# Altium PCB PCB1.PcbDoc (part 2 of 2)
Units mil, origin at the board's own origin, x right, y up, seen from the top; angles counter-clockwise.
Board outline 16280 x 10200 mil, 2 copper layers (Top Layer, Bottom Layer); 163 components, 196 nets, 768 pads, 183 vias.
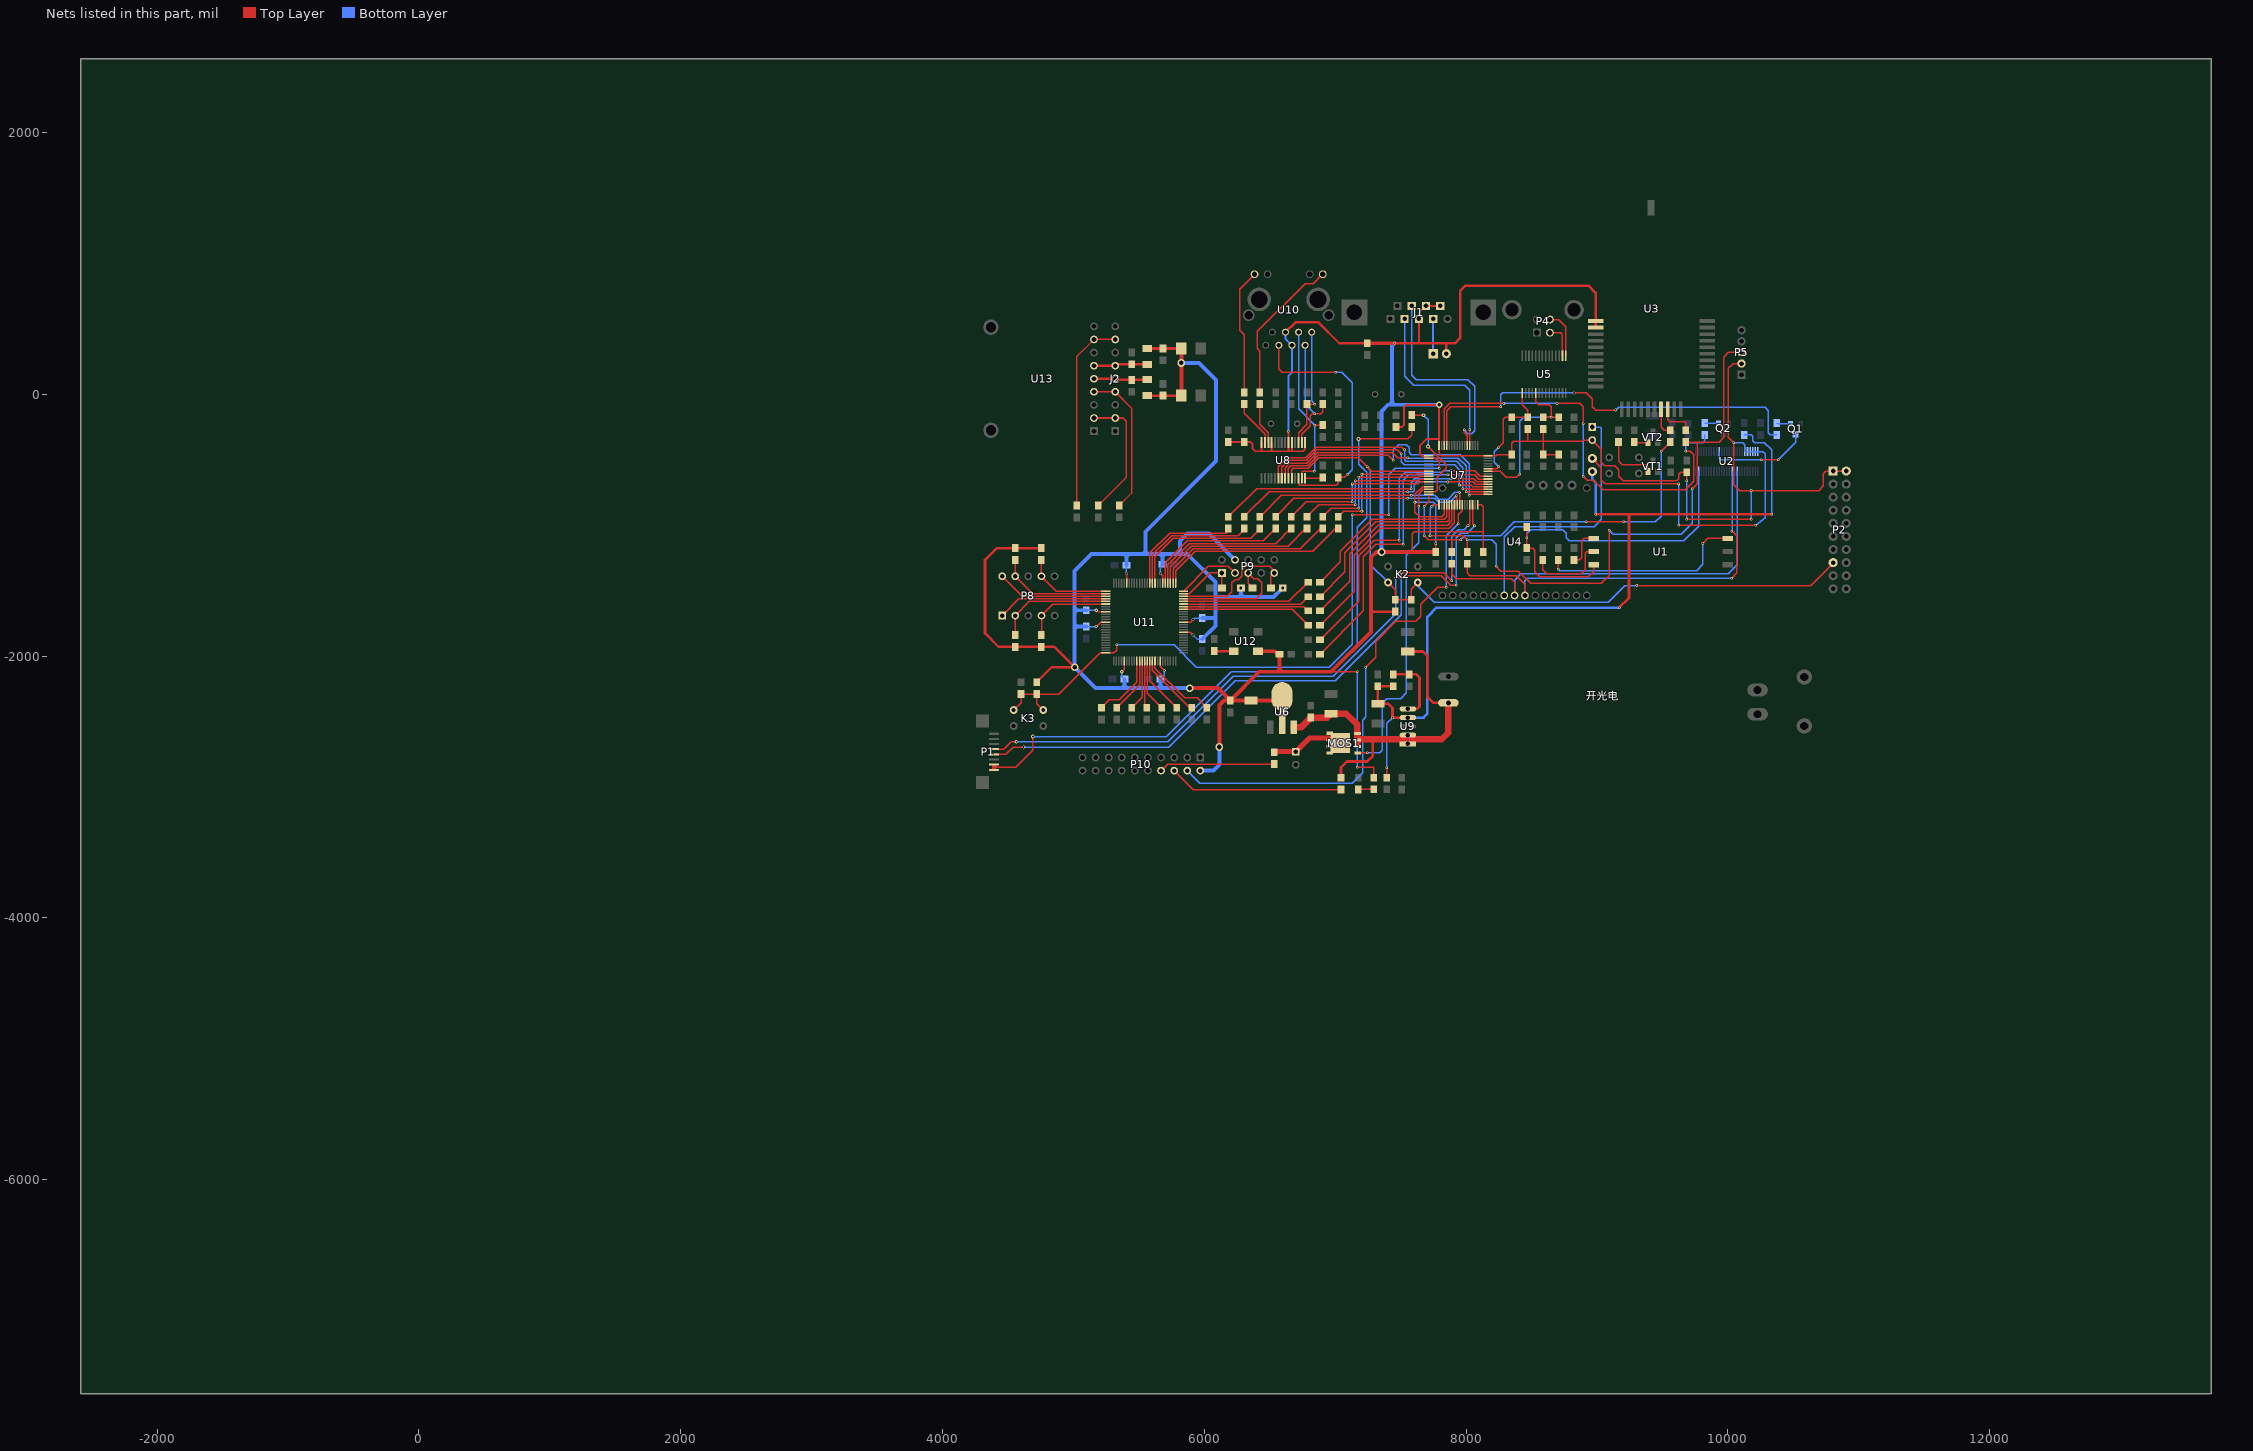
[diagram p2: the nets of this part, all layers, seen from the top]

## Via types
v1: diameter 19.68, hole 11.81, Top Layer to Bottom Layer, 147 vias
v2: diameter 25.59, hole 13.78, Top Layer to Bottom Layer, 10 vias
v3: diameter 23.62, hole 13.78, Top Layer to Bottom Layer, 8 vias
v4: diameter 30, hole 15, Top Layer to Bottom Layer, 6 vias
v5: diameter 59.06, hole 35.43, Top Layer to Bottom Layer, 5 vias
v6: diameter 157.48, hole 137.8, Top Layer to Bottom Layer, 4 vias
v7: diameter 31.5, hole 19.68, Top Layer to Bottom Layer, 2 vias
v8: diameter 50, hole 28, Top Layer to Bottom Layer, 1 vias

## Nets (pads, with @x,y where several pads share a name; then routed paths per layer and width w, separated by ;. In a path a pad name is that pad's centre, name@x,y a point inside that pad or via, vN(x,y) a via of type N, cw(c..) or ccw(c..) an arc to the next point about the centre after c; other vN are vias at no path point) (continued)
NetDS3_2: DS3.2 R41.2 | length 120.2
  Top Layer w10: R41.2@7175,-3020 7177.99,-3017.01 DS3.2@7294,-3017.01
NetMOS1_5: MOS1.0 MOS1.5 MOS1.6 MOS1.7 MOS1.8 P7.1 R48.1 | length 458.5
  Top Layer w39.37: R48.1@6535,-2730 P7.1@6700,-2730 6805,-2625 6950,-2625
NetP3_1: P3.1 U4.24 | length 2014.7
  Bottom Layer w10: U4.24@8292.44,-1537.05 8292.44,-1090 8372.44,-1010 8980,-1010 9035,-955 9035,-260 9025,-250 P3.1@8965,-250
NetP4_2: P4.2 U5.16 | length 264.4
  Top Layer w10: P4.2@8641,471 8724,471 8737.09,457.91 U5.16@8737.09,295
NetP4_3: P4.3 U5.15 | length 366.2
  Top Layer w10: P4.3@8641,571 8709,571 8762.68,517.32 U5.15@8762.68,295
NetP10_12: P10.12 U7.26 | length 3899.6
  Top Layer w10: v1(7235,-2085) 7310,-2010 7310,-1890 7465,-1735 7615,-1735 7655,-1695 7655,-1605 7785,-1475 v1(7850,-1475) ; v1(7940,-990) 7940,-920 7970.91,-889.09 U7.26@7970.91,-844.02
  Bottom Layer w10: P10.12@5870,-2875 5965,-2970 7130,-2970 7210,-2890 7210,-2490 7235,-2465 v1(7235,-2085) ; v1(7850,-1475) 7850,-1080 v1(7940,-990)
NetP10_13: P10.13 R37.1 | length 1335.1
  Top Layer w10: P10.13@5770,-2875 5915,-3020 R37.1@7045,-3020
NetP10_14: P10.14 R48.2 | length 885.7
  Top Layer w10: P10.14@5670,-2875 5720,-2825 R48.2@6535,-2825
NetQ1_2: Q1.2 R4.1 | length 107.1
  Bottom Layer w10: R4.1@10375,-220 10380,-225 Q1.2@10480,-225
NetQ2_2: Q2.2 R11.1 | length 105
  Bottom Layer w10: R11.1@9825,-220 Q2.2@9930,-220
NetR5_1: R5.1 VT1.1 | length 423.6
  Top Layer w10: R5.1@9165,-365 9165,-510 9195,-540 9375,-540 9390,-555 VT1.1@9390,-590
NetR7_2: R7.2 U2.17 U4.23 | length 3270.4
  Top Layer w10: R7.2@7890,-1295 7890,-1375 7925,-1410 8345,-1410 8371.18,-1436.18 U4.23@8371.18,-1537.05
  Bottom Layer w10: U4.23@8371.18,-1537.05 8371.18,-1418.82 8420,-1370 10005,-1370 10071.87,-1303.13 U2.17@10071.87,-587
NetR9_2: R9.2 U2.15 U4.22 | length 3464.8
  Top Layer w10: R9.2@8010,-1295 8010,-1365 8030,-1385 8385,-1385 8449.92,-1449.92 U4.22@8449.92,-1537.05 ; v1(10030,-1405) 10070,-1365 ; v1@10032.5,-1037.5 10035,-1040 10032.5,-1042.5 10070,-1080 10070,-1365 ; 10070,-1085 10070,-1365
  Bottom Layer w10: U4.22@8449.92,-1537.05 8449.92,-1425.08 8470,-1405 v1(10030,-1405) ; v1@10032.5,-1037.5 U2.15@10032.5,-587
  other v1: 10030,-1045
NetR12_2: R12.2 U3.19 | length 285.7
  Top Layer w10: U3.19@9540,-114.68 9540,-195 9555,-210 9670,-210 9680,-220 R12.2@9680,-275
NetR13_2: R13.2 U3.18 | length 215.7
  Top Layer w10: U3.18@9490,-114.68 9490,-250 9515,-275 R13.2@9560,-275
NetR14_1: R14.1 VT2.1 | length 107.1
  Top Layer w10: R14.1@9285,-365 9290,-370 VT2.1@9390,-370
NetR21_2: R21.2 U7.15 | length 852.3
  Top Layer w10: R21.2@7584,-159 7674,-159 v4(7675,-160) ; v4@7710,-390 v4(7710,-400) 7850,-540 7850,-565 7780,-635 7780,-731.5 7765.91,-745.59 U7.15@7715,-745.59
  Bottom Layer w10: v4@7680,-165 v4(7675,-160) 7710,-195 v4(7710,-400)
NetR22_1: R22.1 U11.21 | length 1013.9
  Top Layer w10: U11.21@5842.24,-1582.52 6647.48,-1582.52 R22.1@6795,-1435
NetR22_2: R22.2 U7.20 | length 1314
  Top Layer w10: R22.2@6885,-1435 7040,-1280 7040,-1200 7285,-955 7835,-955 7852.8,-937.2 U7.20@7852.8,-844.02
NetR23_1: R23.1 U11.20 | length 976.5
  Top Layer w10: U11.20@5842.24,-1602.2 6737.8,-1602.2 R23.1@6795,-1545
NetR23_2: R23.2 U7.21 | length 1429.3
  Top Layer w10: R23.2@6885,-1545 7075,-1355 7075,-1210 7310,-975 7855,-975 7872.48,-957.52 U7.21@7872.48,-844.02
NetR24_1: R24.1 U11.19 | length 966.5
  Top Layer w10: U11.19@5842.24,-1621.89 6761.89,-1621.89 R24.1@6795,-1655
NetR24_2: R24.2 U7.22 | length 1538.6
  Top Layer w10: R24.2@6885,-1655 7110,-1430 7110,-1220 7330,-1000 7860,-1000 7892.17,-967.83 U7.22@7892.17,-844.02
NetR25_1: R25.1 U11.18 | length 1003.9
  Top Layer w11.81: U11.18@5842.24,-1641.57 6671.57,-1641.57 R25.1@6795,-1765
NetR25_2: R25.2 U7.23 | length 1650.9
  Top Layer w10: R25.2@6885,-1765 7145,-1505 7145,-1230 7350,-1025 7870,-1025 7911.85,-983.15 U7.23@7911.85,-844.02
NetR26_1: R26.1 U11.26 | length 1451.9
  Top Layer w10: U11.26@5781.22,-1442.76 5781.22,-1348.78 5930,-1200 6830,-1200 R26.1@7005,-1025
NetR26_2: R26.2 U7.8 | length 1012.5
  Top Layer w10: R26.2@7005,-935 R26.2@7025,-935 7065,-895 v1(7205,-895) ; v1(7205,-610) 7620,-610 7622.21,-607.79 U7.8@7715,-607.79
  Bottom Layer w10: v1(7205,-895) v1(7205,-610)
NetR27_1: R27.1 U11.27 | length 1365.5
  Top Layer w10: U11.27@5761.54,-1442.76 5761.54,-1333.46 5915,-1180 6735,-1180 R27.1@6890,-1025
NetR27_2: R27.2 U7.9 | length 1090
  Top Layer w10: R27.2@6890,-935 R27.2@6905,-935 6970,-870 v1(7180,-870) ; v1(7180,-635) 7635,-635 7642.52,-627.48 U7.9@7715,-627.48
  Bottom Layer w10: v1(7180,-870) v1(7180,-635)
NetR28_1: R28.1 U11.28 | length 1279.2
  Top Layer w10: U11.28@5741.85,-1442.76 5741.85,-1318.15 5900,-1160 6640,-1160 R28.1@6775,-1025
NetR28_2: R28.2 U7.10 | length 1167.6
  Top Layer w10: R28.2@6775,-935 R28.2@6785,-935 6875,-845 v1(7155,-845) ; v1(7155,-660) 7635,-660 7647.84,-647.16 U7.10@7715,-647.16
  Bottom Layer w10: v1(7155,-845) v1(7155,-660)
NetR29_1: R29.1 U11.29 | length 1192.8
  Top Layer w10: U11.29@5722.17,-1442.76 5722.17,-1302.83 5885,-1140 6545,-1140 R29.1@6660,-1025
NetR29_2: R29.2 U7.11 | length 1245.2
  Top Layer w10: R29.2@6660,-935 R29.2@6665,-935 6780,-820 v1(7130,-820) ; v1(7130,-685) 7635,-685 7653.15,-666.85 U7.11@7715,-666.85
  Bottom Layer w10: v1(7130,-820) v1(7130,-685)
NetR30_1: R30.1 U11.30 | length 1106.5
  Top Layer w10: U11.30@5702.48,-1442.76 5702.48,-1287.52 5870,-1120 6450,-1120 R30.1@6545,-1025
NetR30_2: R30.2 U7.24 | length 1542.9
  Top Layer w10: R30.2@6545,-935 6685,-795 v1(7555,-795) ; v1(7925,-775) 7925,-795 7931.54,-801.54 U7.24@7931.54,-844.02
  Bottom Layer w10: v1(7555,-795) 7760,-795 7790,-825 7875,-825 v1(7925,-775)
NetR31_1: R31.1 U11.34 | length 1097.3
  Top Layer w10: U11.34@5623.74,-1442.76 5623.74,-1241.26 5765,-1100 6355,-1100 R31.1@6430,-1025
NetR31_2: R31.2 U7.25 | length 1718.9
  Top Layer w10: R31.2@6430,-935 6430,-930 6590,-770 v1(7580,-770) ; v1(7950,-750) 7951.22,-751.22 U7.25@7951.22,-844.02
  Bottom Layer w10: v1(7580,-770) 7760,-770 7790,-800 7865,-800 7915,-750 v1(7950,-750)
NetR32_1: R32.1 U11.35 | length 1011
  Top Layer w10: U11.35@5604.06,-1442.76 5604.06,-1225.94 5750,-1080 6260,-1080 R32.1@6315,-1025
NetR32_2: R32.2 U7.37 | length 2001.6
  Top Layer w10: R32.2@6315,-935 6315,-925 6495,-745 v1(7555,-745) ; v1(7860,-670) 8055,-670 8071.54,-686.53 U7.37@8167.76,-686.53
  Bottom Layer w10: v1(7555,-745) 7595,-745 7605,-735 7605,-690 7625,-670 v1(7860,-670)
NetR33_1: R33.1 U11.36 | length 924.6
  Top Layer w10: U11.36@5584.37,-1442.76 5584.37,-1210.63 5735,-1060 6165,-1060 R33.1@6200,-1025
NetR33_2: R33.2 U7.38 | length 2132.1
  Top Layer w10: R33.2@6200,-935 6200,-920 6400,-720 v1(7580,-720) ; v1(7885,-645) 8060,-645 8081.85,-666.85 U7.38@8167.76,-666.85
  Bottom Layer w10: v1(7580,-720) 7580,-675 7610,-645 v1(7885,-645)
NetR34_2: R34.2 U7.39 | length 2393.7
  Top Layer w10: R34.2@6885,-1985 7215,-1655 7215,-1240 7310,-1145 v1(7520,-1145) ; v1(7860,-615) 8065,-615 8097.16,-647.16 U7.39@8167.76,-647.16
  Bottom Layer w10: v1(7520,-1145) 7520,-655 7560,-615 v1(7860,-615)
NetR35_2: R35.2 U7.40 | length 2315
  Top Layer w10: R35.2@6885,-1875 7180,-1580 7180,-1235 7300,-1115 v1(7490,-1115) ; v1(7885,-585) 8065,-585 8107.48,-627.48 U7.40@8167.76,-627.48
  Bottom Layer w10: v1(7490,-1115) 7490,-640 7535,-595 7815,-595 7825,-585 v1(7885,-585)
NetR36_1: R36.1 U8.27 | length 359.2
  Top Layer w10: R36.1@6305,-75 6305,-145 6464.25,-304.25 U8.27@6464.25,-368.19
NetR36_2: R36.2 U10.12 | length 964.7
  Top Layer w10: R36.2@6305,15 6305,455 6270,490 6270,803.74 U10.12@6384.17,917.91
NetR38_1: R38.1 U8.26 | length 320
  Top Layer w10: R38.1@6425,-75 6425,-230 6489.84,-294.84 U8.26@6489.84,-368.19
NetR38_2: R38.2 U10.9 | length 1152.1
  Top Layer w10: R38.2@6425,15 6425,330 6405,350 6405,480 6770,845 6832.91,845 U10.9@6903.39,915.48
NetR39_1: R39.1 R42.2 U9.5 | length 527.1
  Top Layer w20: R39.1@7445,-2140 R42.2@7565,-2140 7620,-2140 7645,-2165 7645,-2385 7626.72,-2403.28 U9.5@7555.86,-2403.28
NetR43_2: R43.2 U8.14 | length 136.5
  Top Layer w10: U8.14@6771.34,-641.81 6898.19,-641.81 R43.2@6905,-635
NetR44_2: R44.2 U8.17 U10.1 | length 940.2
  Top Layer w10: U8.17@6720.16,-368.19 6720.16,-294.84 6785,-230 R44.2@6785,-75 v1(6845,-75)
  Bottom Layer w10: U10.1@6820.59,475 6820.59,-50.59 v1(6845,-75)
NetR45_2: R45.2 U8.16 U10.2 | length 1018.2
  Top Layer w10: U8.16@6745.75,-368.19 6745.75,-304.25 6810,-240 6810,-165 6825,-150 ; R45.2@6905,-75 6905,-135 6890,-150 ; 6825,-150 v1(6845,-150) ; 6825,-150 v1(6845,-150) ; v1(6845,-150) 6890,-150 ; v1(6845,-150) 6890,-150
  Bottom Layer w10: U10.2@6770.2,375 6770.2,-75.2 v1(6845,-150)
NetR46_2: R46.2 U8.13 U10.3 | length 1327.1
  Top Layer w10: U8.13@6745.75,-641.81 6745.75,-594.25 6751.49,-588.51 v1(6841.49,-588.51) v1@6845,-585 ; v1(6845,-235) R46.2@6905,-235
  Bottom Layer w10: U10.3@6720.59,475 6720.59,-110.59 v1(6845,-235) 6845,-585 v1(6841.49,-588.51)
NetR47_2: R47.2 U8.12 U10.6 | length 1981.8
  Top Layer w10: U10.6@6570,375 6570,195 6595,170 v1(7005,170) ; U8.12@6720.16,-641.81 6720.16,-685.16 6730,-695 7010,-695 7025,-680 R47.2@7025,-635 7070,-635 v1(7095,-610)
  Bottom Layer w10: v1(7005,170) 7050,170 7130,90 7130,-575 v1(7095,-610)
NetR53_2: R53.2 U11.85 | length 513.9
  Top Layer w10: R53.2@5215,-2395 5275,-2335 5350,-2335 5485.94,-2199.06 U11.85@5485.94,-2037.24
NetR54_2: R54.2 U11.86 | length 430.5
  Top Layer w10: R54.2@5330,-2395 5505.63,-2219.37 U11.86@5505.63,-2037.24
NetR55_2: R55.2 U11.87 | length 391
  Top Layer w10: R55.2@5445,-2395 5525.32,-2314.68 U11.87@5525.32,-2037.24
NetR58_2: R58.2 U11.88 | length 364
  Top Layer w10: U11.88@5545,-2037.24 5545,-2380 R58.2@5560,-2395
NetR59_2: R59.2 U11.89 | length 403.4
  Top Layer w10: U11.89@5564.69,-2037.24 5564.69,-2284.69 R59.2@5675,-2395
NetR60_2: R60.2 U11.90 | length 442.9
  Top Layer w10: U11.90@5584.37,-2037.24 5584.37,-2189.37 R60.2@5790,-2395
NetR61_2: R61.2 U11.91 | length 491.2
  Top Layer w10: U11.91@5604.06,-2037.24 5604.06,-2109.06 5890,-2395 R61.2@5905,-2395
NetR62_2: R62.2 U12.3 | length 147.2
  Top Layer w19.68: R62.2@6078.27,-1963.27 U12.3@6225.47,-1963.27
NetR63_2: R63.2 U11.92 | length 577.5
  Top Layer w10: U11.92@5623.74,-2037.24 5623.74,-2093.74 5850,-2320 5945,-2320 R63.2@6020,-2395
NetS1_1: S1.1 U2.26 U2.27 U2.28 U2.29 U2.30 | length 2422.1
  Top Layer w10: S1.1@8965,-490 9035,-560 9035,-655 9065,-685 v1(9625,-685) ; v1(9625,-1000) v1(10215,-1000)
  Bottom Layer w10: v1(9625,-1000) v1(9625,-685) ; U2.30@10150.61,-437.39 U2.29@10170.29,-437.39 U2.28@10189.98,-437.39 U2.27@10209.66,-437.39 U2.26@10229.35,-437.39 10267.39,-437.39 10285,-455 10285,-945 v1(10215,-1000)
NRST: C7.2 K2.2 K2.3 P2.15 R16.2 U7.7 U8.10 | length 5957.2
  Top Layer w10: U8.10@6668.98,-641.81 6668.98,-576.02 6680,-565 6795,-565 6875,-485 7175,-485 7278.11,-588.11 U7.7@7715,-588.11 ; K2.2@7405,-1437.6 7460,-1492.6 R16.2@7460,-1570 C7.2@7580,-1570 7580,-1488.6 K2.3@7631,-1437.6 ; v1@9304,-1461 v1(9305,-1460) 9305,-1461 10635,-1461 P2.15@10805,-1291
  Bottom Layer w10: v1(7245,-555) 7270,-580 7270,-1302.6 K2.2@7405,-1437.6 ; K2.3@7606,-1437.6 7758.4,-1590 9085,-1590 9214,-1461 v1@9304,-1461
OPT_S_1: P8.1 U11.54 | length 845.4
  Top Layer w10: P8.1@4455,-1690 4582.17,-1562.83 U11.54@5247.76,-1562.83
OPT_S_2: P8.2 R49.1 U11.55 | length 884.9
  Top Layer w10: P8.2@4555,-1690 4662.48,-1582.52 U11.55@5247.76,-1582.52 ; R49.1@4556.61,-1838.39 P8.2@4556.61,-1690.75
OPT_S_4: P8.4 R51.1 U11.56 | length 676.8
  Top Layer w10: P8.4@4755,-1690 4842.8,-1602.2 U11.56@5247.76,-1602.2 ; R51.1@4756.61,-1838.39 P8.4@4756.61,-1690.75
OPT_S_6: P8.6 U11.53 | length 856.2
  Top Layer w10: P8.6@4455,-1390 4608.15,-1543.15 U11.53@5247.76,-1543.15
OPT_S_7: P8.7 R50.2 U11.52 | length 871.8
  Top Layer w10: P8.7@4555,-1390 4688.46,-1523.46 U11.52@5247.76,-1523.46 ; P8.7@4556.1,-1389.84 R50.2@4556.1,-1266.1
OPT_S_9: P8.9 R52.2 U11.51 | length 663.6
  Top Layer w10: P8.9@4755,-1390 4868.78,-1503.78 U11.51@5247.76,-1503.78 ; P8.9@4756.1,-1389.84 R52.2@4756.1,-1266.1
OTDR_S: MOS1.4 U7.14 | length 2422.9
  Top Layer w10: MOS1.4@7172,-2740 v1(7245,-2740) ; v1(7640,-855) 7640,-760 7674.1,-725.9 U7.14@7715,-725.9
  Bottom Layer w10: v1(7245,-2740) 7340,-2740 7360,-2720 7360,-2360 7395,-2325 7500,-2325 7545,-2280 7545,-1230 7640,-1135 v1(7640,-855)
OTDR_V33: P1.7 P1.8 R21.1 | length 5386.6
  Top Layer w10: P1.8@4393.74,-2868.9 4412.64,-2850 4414.21,-2850 ; P1.7@4393.74,-2829.53 4414.21,-2850 ; v4(4690,-2615) 4690,-2720 4560,-2850 4414.21,-2850 ; v4(7180,-340) 7555,-340 7584,-311 R21.1@7584,-249
  Top Layer w30: 4395,-2860 4395,-2840
  Bottom Layer w10: v4(4690,-2615) 5710,-2615 6205,-2120 ; 6210,-2120 6970,-2120 7170,-1920 7170,-1015 7240,-945 7240,-595 7180,-535 v4(7180,-340)
PB8: R4.2 U7.61 | length 3179.7
  Top Layer w10: U7.61@7852.8,-391.26 7852.8,-127.2 7885,-95 v1(8265,-95) ; v1(8825,10) 8920,10 8965,-35 8965,-95 8990,-120 v1(9145,-120)
  Bottom Layer w10: v1(8265,-95) 8265,-5 8280,10 v1(8825,10) ; v1(9145,-120) 9165,-100 10285,-100 10310,-125 10310,-295 10325,-310 R4.2@10375,-310
PB9: R11.2 U7.62 | length 3339.2
  Top Layer w10: U7.62@7833.11,-391.26 7833.11,-111.89 7875,-70 v1(8290,-70) ; v1(8695,-70) 8870,-70 8895,-95 v1(8895,-225) ; v1(8895,-625) 8925,-655 8973.43,-655 9048.43,-730 9675,-730 9740,-665 9740,-460 9715,-435 v1(9680,-435)
  Bottom Layer w10: v1(8290,-70) v1(8695,-70) ; v1(8895,-625) v1(8895,-225) ; v1(9680,-435) 9680,-390 9700,-370 9810,-370 9825,-355 R11.2@9825,-310
PC11: J1.4 U7.52 | length 1402.2
  Top Layer w10: U7.52@8029.96,-391.26 v1(8030,-270)
  Bottom Layer w10: J1.4@7530.89,575.75 7530.89,139.11 7600,70 7990,70 8030,30 v1(8030,-270)
PC12: J1.8 U7.53 | length 1618.4
  Top Layer w10: v1(7985,-270) 7985,-290 8010.28,-315.28 U7.53@8010.28,-391.26
  Bottom Layer w10: J1.8@7585.05,675.75 7585.05,144.95 7620,110 8015,110 8065,60 8065,-280 8045,-300 8015,-300 v1(7985,-270)
RD: J2.2 R65.2 U13.2 | length 987.9
  Top Layer w11.81: U13.2@5161.06,-181.06 J2.2@5320,-181.06 5381.06,-181.06 5405,-205 5405,-635 R65.2@5190,-850
REMOTE: J1.2 P6.1 | length 266.1
  Bottom Layer w15: J1.2@7749.22,575.75 7749.22,310.78 P6.1@7750,310
RST_N: C44.2 K3.2 K3.3 R67.1 U7.2 U11.75 | length 5261.6
  Top Layer w10: K3.3@4544,-2412.4 4544,-2411 4600,-2355 C44.2@4600,-2290 R67.1@4720,-2290 ; K3.2@4770,-2412.4 4720,-2362.4 R67.1@4720,-2290 ; v1(5330,-1915) 5330,-1955 5308.78,-1976.22 U11.75@5247.76,-1976.22 5203.78,-1976.22 4890,-2290 R67.1@4720,-2290 ; v1(7130,-920) v1(7410,-920) ; U7.2@7715,-489.68 7769.68,-489.68 7795,-515 v1(7795,-565)
  Bottom Layer w10: v1(5330,-1915) 5770,-1915 5940,-2085 6955,-2085 7130,-1910 v1(7130,-920) ; v1(7410,-920) 7410,-615 7460,-565 v1(7795,-565)
"RX VCC": C40.1 J2.5 L2.2 U13.5 | length 413.7
  Top Layer w19.68: U13.5@5155,118.94 J2.5@5320,118.94 5328.94,110 C40.1@5445,110 L2.2@5565,110
SD: J2.4 R66.2 U13.4 | length 1124
  Top Layer w11.81: U13.4@5156.06,18.94 J2.4@5320,18.94 5445,-106.06 5445,-755 R66.2@5350,-850
SIM-CLK: R1.1 U1.3 | length 293.6
  Top Layer w10: R1.1@8825,-1265 8870,-1265 8885,-1250 8885,-1120 8903.37,-1101.63 U1.3@8974.75,-1101.63
SIM-IO: R2.1 U1.6 | length 1563.5
  Top Layer w10: v1(8705,-1335) R2.1@8705,-1265 ; v1(9810,-1140) 9848.37,-1101.63 U1.6@9998.37,-1101.63
  Bottom Layer w10: v1(8705,-1335) 8716.78,-1346.78 9763.22,-1346.78 9810,-1300 v1(9810,-1140)
SIM-RST: R3.1 U1.2 | length 620.1
  Top Layer w10: R3.1@8585,-1265 8585,-1340 8615,-1370 8880,-1370 8910,-1340 8910,-1215 8923.37,-1201.63 U1.2@8974.75,-1201.63
SIM-VCC: C4.2 R8.2 U1.1 U2.2 | length 2805
  Top Layer w10: C4.2@8465,-1015 v1(8465,-1095) R8.2@8465,-1175 8510,-1175 8525,-1190 8525,-1355 8565,-1395 8935,-1395 8974.75,-1355.25 U1.1@8974.75,-1301.63
  Bottom Layer w10: v1(8465,-1095) 8465,-1065 8495,-1035 8740,-1035 8765,-1060 8765,-1095 8790,-1120 9665,-1120 9776.59,-1008.41 U2.2@9776.59,-587
SPI-MISO: U7.35 U8.6 | length 2021.6
  Top Layer w10: U8.6@6566.61,-641.81 6566.61,-553.39 6635,-485 6775,-485 6855,-405 7510,-405 v1(7530,-425) ; v1(7975,-720) 8020,-720 8025.91,-725.9 U7.35@8167.76,-725.9
  Bottom Layer w10: v1(7530,-425) 7530,-500 7542.5,-512.5 7927.5,-512.5 7975,-560 v1(7975,-720)
SPI-MOSI: U7.36 U8.7 | length 1936.5
  Top Layer w10: U8.7@6592.2,-641.81 6592.2,-557.8 6645,-505 6780,-505 6860,-425 7475,-425 v1(7505,-455) ; v1(7950,-695) 8040,-695 8051.22,-706.22 U7.36@8167.76,-706.22
  Bottom Layer w10: v1(7505,-455) 7505,-515 7527.5,-537.5 7912.5,-537.5 7950,-575 v1(7950,-695)
SPI-NSS: U7.33 U8.9 | length 2080.2
  Top Layer w10: U8.9@6643.39,-641.81 6643.39,-566.61 6665,-545 6790,-545 6870,-465 7405,-465 v1(7445,-505) ; v1@8029.73,-765.27 U7.33@8167.76,-765.27
  Bottom Layer w10: v1(7445,-505) 7445,-425 7485,-385 7545,-385 7564.38,-404.37 7564.38,-444.37 7582.5,-462.5 7957.5,-462.5 8025,-530 v1(8025,-770) v1@8029.73,-765.27
SPI-SCK: U7.34 U8.8 | length 1919.8
  Top Layer w10: U8.8@6617.8,-641.81 6617.8,-562.2 6655,-525 6785,-525 6865,-445 7440,-445 7480,-485 v1(7555,-485) ; v1(8000.59,-745.59) U7.34@8167.76,-745.59
  Bottom Layer w10: v1(7555,-485) 7557.5,-487.5 7942.5,-487.5 8000.59,-545.59 v1(8000.59,-745.59)
TCK: P9.1 R64.2 U11.24 | length 473.4
  Top Layer w10: U11.24@5842.24,-1523.46 5886.54,-1523.46 6045,-1365 P9.1@6135,-1365 R64.2@6135,-1480
TD: J2.8 R68.2 U13.8 | length 1484.8
  Top Layer w11.81: R68.2@5025,-850 5025,286.25 U13.8@5157.6,418.85 ; U13.8@5158.94,418.94 J2.8@5320,418.94
TDI: P9.9 R57.1 U11.23 | length 1009.5
  Top Layer w10: U11.23@5842.24,-1543.15 6176.85,-1543.15 6210,-1510 6210,-1440 6235,-1415 6260,-1415 6285,-1390 6285,-1345 6315,-1315 6500,-1315 6535,-1350 P9.9@6535,-1365 6510,-1390 R57.1@6510,-1480
TDO: P9.3 U11.25 | length 491.7
  Top Layer w10: U11.25@5842.24,-1503.78 6031.02,-1315 6185,-1315 P9.3@6235,-1365
TERM_ON: Q1.3 U2.41 | length 887
  Top Layer w10: v1(10255,-500) v1(10385,-500) v1(10255,-500)
  Bottom Layer w10: U2.41@9934.07,-437.39 9934.07,-489.07 9945,-500 v1(10255,-500) ; v1(10385,-500) 10517.5,-367.5 Q1.3@10517.5,-305
TMS: P9.5 R56.1 U11.22 | length 961.1
  Top Layer w10: U11.22@5842.24,-1562.83 6397.17,-1562.83 6440,-1520 6440,-1440 6410,-1410 6380,-1410 P9.5@6335,-1365 6335,-1445 R56.1@6370,-1480
"TX VCC": C43.2 J2.6 L3.2 U13.6 | length 414.6
  Top Layer w19.68: U13.6@5155,218.94 J2.6@5320,218.94 5331.06,230 C43.2@5445,230 L3.2@5565,230
UART1_RX: C13.2 R18.2 U5.1 U7.43 | length 889.1
  Top Layer w10: U7.43@8167.76,-568.42 8236.58,-568.42 v1(8250,-555) ; v1(8247.82,-407.18) 8285,-370 8285,-190 8300,-175 C13.2@8350,-175 R18.2@8470,-175 8470,-120 8430,-80 U5.1@8430,10
  Bottom Layer w10: v1(8247.82,-407.18) 8215,-440 8215,-520 v1(8250,-555)
UART1_TX: C12.2 R17.2 U5.5 U7.42 | length 1328.7
  Top Layer w10: U7.42@8167.76,-588.11 8260,-588.11 8306.89,-635 8385,-635 v1(8410,-610) ; U5.5@8532.36,10 8532.36,-55 8557.36,-80 8635,-80 8650,-95 v1(8650,-175) ; R17.2@8590,-175 v1(8650,-175) ; C12.2@8710,-175 v1(8650,-175)
  Bottom Layer w10: v1(8410,-610) 8410,-205 8440,-175 v1(8650,-175)
UART2_RX: P5.3 R9.1 R12.1 U7.17 | length 4756.3
  Top Layer w10: v1(7725,-1080) 7980,-1080 v1(8010,-1110) R9.1@8010,-1205 ; v1(7740,-855) 7750.98,-844.02 U7.17@7793.74,-844.02 ; v1(8230,-1315) 8265,-1350 8400,-1350 8495,-1445 9035,-1445 9095,-1385 v1(9095,-1040) ; R12.1@9680,-365 9765,-365 ; v1(9730,-720) 9765,-685 9765,-365 ; P5.3@10105,320 10005,320 9970,285 9970,-330 9935,-365 9765,-365
  Bottom Layer w10: 7725,-1070 7725,-870 v1(7740,-855) v1@7740,-860 ; v1(8010,-1110) 8195,-1110 8230,-1145 v1(8230,-1315) ; v1(9095,-1040) 9125,-1070 9645,-1070 9730,-985 v1(9730,-720)
UART2_TX: R7.1 R13.1 U7.16 | length 3155.2
  Top Layer w10: v1(7680,-1080) 7710,-1110 ; v1(7680,-855) 7715,-820 U7.16@7715,-765.27 ; R7.1@7890,-1205 7890,-1110 ; v1(8920,-975) v1(9205,-975) ; v1(9490,-435) R13.1@9560,-365 ; 7710,-1110 7890,-1110 ; 7710,-1110 7890,-1110 ; 7890,-1110 v1(7960,-1110) 7890,-1110
  Bottom Layer w10: 7680,-1070 v1(7680,-855) ; v1(7960,-1110) 7990,-1080 8265,-1080 8370,-975 v1(8920,-975) ; v1(9205,-975) 9445,-975 9490,-930 v1(9490,-435)
UART3_RX: P1.4 U7.30 | length 4982.5
  Top Layer w10: P1.4@4393.74,-2711.42 4468.58,-2711.42 4525,-2655 v2(4565,-2655) ; v1(7465,-1400) 7520,-1400 7535,-1385 7810,-1385 7885,-1460 v1(7925,-1460) ; U7.30@8049.65,-844.02 8049.65,-989.65 v1(8065,-1005)
  Bottom Layer w10: v2(4565,-2655) 5720,-2655 6220,-2155 6985,-2155 7465,-1675 v1(7465,-1400) ; v1(7925,-1460) 7925,-1095 7960,-1060 8010,-1060 v1(8065,-1005)
UART3_TX: P1.5 U7.29 | length 4947.9
  Top Layer w10: P1.5@4393.74,-2750.79 4484.21,-2750.79 4540,-2695 v2(4620,-2695) ; v1(7505,-1365) 7830,-1365 v1(7890,-1425) ; v1(8015,-1005) 8029.96,-990.04 U7.29@8029.96,-844.02
  Bottom Layer w10: v2(4620,-2695) 5730,-2695 6235,-2190 7000,-2190 7505,-1685 v1(7505,-1365) ; v1(7890,-1425) 7890,-1085 7940,-1035 7985,-1035 v1(8015,-1005)
VCC: C8.1 CA2.1 D1.2 MOS1.1 MOS1.2 MOS1.3 R37.2 U6.3 U9.1 U9.2 开光电.3 | length 2807.5
  Top Layer w20: R37.2@7045,-2930 7045,-2850 7090,-2805 7245,-2805 7287.5,-2762.5 7287.5,-2637.5 7285,-2635 ; D1.2@7554.06,-1966 D1.2@7555.06,-1965 7670,-1965 7705,-2000 7705,-2312.56 7750,-2357.56 开光电.3@7865,-2357.56 ; 7700,-2635 7705,-2630
  Top Layer w50: U6.3@6685,-2545 6740,-2545 C8.1@6815,-2470 6940,-2470 CA2.1@6969,-2441 ; CA2.1@6970,-2440 7085,-2440 7170.5,-2525.5 MOS1.1@7170.5,-2591 ; 7170.5,-2675 MOS1.2@7170.5,-2640 ; MOS1.2@7171,-2640 MOS1.2@7170.5,-2640 ; MOS1.1@7171,-2591 MOS1.1@7170.5,-2591 ; 开光电.3@7865,-2357.56 7865,-2585 7815,-2635 7700,-2635 7555.86,-2635 7285,-2635 7171,-2635 MOS1.2@7170.5,-2635 ; MOS1.2@7170.5,-2640 MOS1.2@7170.5,-2635 ; MOS1.2@7170.5,-2635 MOS1.1@7170.5,-2591
VCC3V3: C9.1 C14.1 C15.1 C16.1 C17.1 C21.1 C26.1 C29.2 C30.2 C31.2 C32.2 C33.2 C34.2 C35.2 C36.2 C37.2 C38.1 C39.1 C41.1 C42.1 CA3.1 DS3.1 J1.3 J1.6 J1.7 L1.1 L2.1 L3.1 P2.1 P2.2 P3.2 P5.2 P6.2 P9.4 P10.11 R6.2 R16.1 R17.1 R18.1 R19.2 R20.2 R49.2 R50.1 R51.2 R52.1 R56.2 R57.2 R67.2 U2.31 U3.1 U3.2 U6.2 U7.1 U7.13 U7.19 U7.32 U7.48 U7.64 U8.15 U8.19 U8.20 U8.25 U8.28 U10.4 U10.5 U11.9 U11.13 U11.31 U11.45 U11.59 U11.63 U11.80 U11.94 U12.4 | length 34210.4
  Top Layer w10: U8.19@6668.98,-402.64 U8.19@6668.98,-368.19 ; 6970,-2120 v1(7170,-2120) ; v1(7170,-2850) 7171,-2851 7294,-2851 DS3.1@7294,-2930 ; 7590,-1205 7590,-1065 7605,-1050 8130,-1050 ; U7.13@7715,-706.22 7668.78,-706.22 7610,-765 v1(7610,-825) 7610,-900 7645,-935 7815,-935 7833.11,-916.89 U7.19@7833.11,-844.02 ; C16.1@7770,-1205 v1(7770,-1140) ; U7.64@7793.74,-391.26 7793.74,-448.74 7815,-470 U7.48@8167.76,-470 8230,-470 8240,-460 C17.1@8350,-460 8350,-375 8365,-360 8470,-360 ; U7.32@8089.02,-844.02 8089.02,-845 8115,-845 8130,-860 8130,-1050 ; C14.1@8130,-1205 8130,-1050 ; R18.1@8470,-265 8470,-360 ; R17.1@8590,-265 8590,-360 ; R20.2@8710,-460 R19.2@8590,-460 8590,-360 ; v1(9685,-955) v1(10180,-955) ; v1(9685,-660) R6.2@9685,-595 9640,-595 9625,-610 9625,-645 9610,-660 9200,-660 9165,-625 9165,-575 9135,-545 9060,-545 9035,-520 9035,-420 P3.2@8965,-350 8895,-350 8885,-360 8590,-360 ; P5.2@10105,235 10040,235 10005,200 10005,-330 v1(10045,-370) 10045,-690 10090,-735 v1(10180,-735) ; v1@10180,-740 v1(10180,-735) ; P2.2@10905,-586 P2.1@10805,-586 10750,-586 10730,-606 10730,-700 10695,-735 v1(10180,-735) ; 8470,-360 8590,-360
  Top Layer w11.02: v3(5175,-1775) 5210,-1740 U11.63@5247.76,-1740 ; v3(5175,-1650) 5186.26,-1661.26 U11.59@5247.76,-1661.26 ; v3(5370,-2120) 5387.52,-2102.48 U11.80@5387.52,-2037.24 ; v3(5405,-1370) 5407.2,-1372.2 U11.45@5407.2,-1442.76 ; U11.94@5663.11,-2037.24 5663.11,-2078.11 v3(5695,-2110) ; v3(5665,-1370) 5682.8,-1387.8 U11.31@5682.8,-1442.76 ; U11.9@5842.24,-1818.74 5893.74,-1818.74 v3(5915,-1840) ; U11.13@5842.24,-1740 5895,-1740 v3(5915,-1720)
  Top Layer w15: C26.1@6185,-365 C21.1@6305,-365 6355,-365 6370,-380 6370,-415 6390,-435 6438.66,-435 ; U8.28@6438.66,-368.19 6438.66,-435 ; U8.25@6515.43,-368.19 6515.43,-435 ; v1(6643.39,-281.61) U8.20@6643.39,-368.19 6643.39,-435 ; U8.19@6668.98,-402.64 6668.98,-433.98 6670,-435 ; U8.15@6771.34,-368.19 6771.34,-418.66 6755,-435 6670,-435 ; C15.1@7465,-250 7510,-250 7525,-235 7525,-100 7545,-80 7793.74,-80 U7.64@7793.74,-391.26 ; 7640.05,390.05 J1.3@7640.05,575.75 7640.05,621.58 J1.7@7694.22,675.75 J1.6@7803.39,675.75 ; U7.1@7715,-470 7665,-470 7650,-455 7650,-390 7700,-340 7785,-340 ; 6438.66,-435 6515.43,-435 ; 6515.43,-435 6643.39,-435 ; 6643.39,-435 6670,-435
  Top Layer w19.68: R67.2@4720,-2200 4835,-2085 v5(5010,-2085) 4855,-1930 R51.2@4755,-1930 R49.2@4555,-1930 4430,-1930 4325,-1825 4325,-1265 4415,-1175 R50.1@4555,-1175 R52.1@4755,-1175 ; L2.1@5565,-10 C39.1@5685,-10 C38.1@5825,-10 ; L3.1@5565,350 C42.1@5685,350 C41.1@5825,350 ; U10.5@6620.59,475 6695.59,550 6871.39,550 7031.39,390 L1.1@7245,390 ; 7275,-1675 7290,-1660 ; 7275,-1645 7290,-1660 ; 7280,-1660 7290,-1660 ; R16.1@7460,-1660 7290,-1660
  Top Layer w20: v1(7455,390) 7850,390 ; P6.2@7850,310 7850,390 ; U3.2@8990.32,510 8990,510 U3.1@8990,560 ; U3.1@8990.32,560 U3.1@8990,560 ; 7850,390 7915,390 7955,430 7955,790 7995,830 8935,830 8990,775 U3.1@8990,560
  Top Layer w30: C38.1@5825,-10 v5(5825,240) C41.1@5825,350 ; v5(5890,-2245) 6106,-2245 C9.1@6200,-2339 ; v5(6115,-2695) 6115,-2375 6150,-2340 C9.1@6200,-2340 ; CA3.1@6340,-2340 6564,-2340 U6.2@6595,-2309 ; CA3.1@6341,-2339 C9.1@6200,-2339 ; U12.4@6410,-1963.27 U12.4@6410.47,-1963.27 6538.27,-1963.27 C37.2@6560,-1985 ; C37.2@6575,-1985 6575,-2100 ; L1.1@7245,390 v1(7455,390) ; C16.1@7770,-1205 7590,-1205 v5(7355,-1205) 7315,-1205 7275,-1245 7275,-1645 7275,-1675 7275,-1815 6970,-2120 6595,-2120 ; C9.1@6200,-2339 6419,-2120 6555,-2120 ; 6555,-2120 6575,-2120 ; 6555,-2120 6575,-2100 ; 6575,-2120 6575,-2100 ; 6575,-2120 6595,-2120 ; 6575,-2100 6595,-2120
  Bottom Layer w10: v1(7170,-2850) v1(7170,-2120) ; v1(7610,-825) 7750,-825 7770,-845 v1(7770,-1140) ; v1(9685,-955) v1(9685,-660) ; v1(10045,-370) 10115,-370 10130.92,-385.92 U2.31@10130.92,-437.39 ; v1(10180,-955) v1@10180,-740
  Bottom Layer w11.81: C35.2@5100,-1775 v3(5175,-1775) ; C34.2@5100,-1650 v3(5175,-1650) ; v3(5370,-2120) 5370,-2155 C36.2@5390,-2175 C36.2@5390,-2180 ; v3(5405,-1370) C29.2@5405,-1305 ; C32.2@5665,-2175 5695,-2145 v3(5695,-2110) ; v3(5665,-1370) 5665,-1315 C33.2@5680,-1300 ; v3(5915,-1840) 5945,-1870 C30.2@5985,-1870 ; v3(5915,-1720) 5925,-1710 C31.2@5985,-1710
  Bottom Layer w15: U10.5@6620.59,475 6620.59,424.61 U10.4@6670.2,375 6670.2,165.2 6643.39,138.39 v1(6643.39,-281.61)
  Bottom Layer w30: C35.2@5100,-1775 5030,-1775 ; C34.2@5100,-1650 5030,-1650 ; C36.2@5390,-2180 5390,-2225 ; C29.2@5405,-1305 5405,-1240 ; C32.2@5665,-2175 5665,-2225 ; C33.2@5680,-1300 5680,-1240 ; v5(5825,240) 5960,240 6090,110 6090,-510 5550,-1050 5550,-1200 ; v5(5890,-2245) 5685,-2245 ; P10.11@5970,-2875 6070,-2875 6115,-2830 v5(6115,-2695) ; C30.2@5985,-1870 6085,-1770 6085,-1710 ; C31.2@5985,-1710 6085,-1710 ; P9.4@6235,-1265 6035,-1065 5870,-1065 5815,-1120 5815,-1200 ; v7(6280,-1480) 6280,-1530 ; v7(6600,-1480) 6530,-1550 6300,-1550 ; v5(7355,-1205) 7355,-130 7405,-80 7415,-80 ; v1(7455,390) 7435,370 7435,-60 ; v8(7795,-80) 7455,-80 ; 5010,-1795 5030,-1775 ; 5010,-1795 v5(5010,-2085) 5170,-2245 5370,-2245 ; 5010,-1795 5010,-1775 ; 5010,-1775 5030,-1775 ; 5010,-1775 5010,-1755 ; 5010,-1755 5030,-1775 ; 5010,-1755 5010,-1670 ; 5010,-1670 5010,-1650 ; 5010,-1670 5030,-1650 ; 5010,-1650 5010,-1630 ; 5010,-1650 5030,-1650 ; 5010,-1630 5030,-1650 ; 5010,-1630 5010,-1350 5140,-1220 5385,-1220 ; 5370,-2245 5390,-2245 ; 5370,-2245 5390,-2225 ; 5385,-1220 5405,-1220 ; 5385,-1220 5405,-1240 ; 5390,-2245 5390,-2225 ; 5390,-2245 5410,-2245 ; 5390,-2225 5410,-2245 ; 5405,-1240 5405,-1220 ; 5405,-1240 5425,-1220 ; 5405,-1220 5425,-1220 ; 5410,-2245 5645,-2245 ; 5425,-1220 5530,-1220 ; 5530,-1220 5550,-1200 ; 5530,-1220 5550,-1220 ; 5550,-1220 5550,-1200 ; 5550,-1220 5570,-1220 ; 5550,-1200 5570,-1220 ; 5570,-1220 5660,-1220 ; 5645,-2245 5665,-2245 ; 5645,-2245 5665,-2225 ; 5660,-1220 5680,-1240 ; 5660,-1220 5680,-1220 ; 5665,-2245 5665,-2225 ; 5665,-2245 5685,-2245 ; 5665,-2225 5685,-2245 ; 5680,-1240 5700,-1220 ; 5680,-1240 5680,-1220 ; 5680,-1220 5700,-1220 ; 5700,-1220 5795,-1220 ; 5795,-1220 5815,-1220 ; 5795,-1220 5815,-1200 ; 5815,-1220 5815,-1200 ; 5815,-1220 5835,-1220 ; 5815,-1200 5835,-1220 ; 5835,-1220 5870,-1220 6085,-1435 6085,-1550 ; 6085,-1710 6085,-1550 ; 6085,-1550 6260,-1550 ; 6260,-1550 6280,-1550 ; 6260,-1550 6280,-1530 ; 6280,-1550 6300,-1550 ; 6280,-1550 6280,-1530 ; 6280,-1530 6300,-1550 ; 7415,-80 7435,-80 ; 7415,-80 7435,-60 ; 7435,-80 7435,-60 ; 7435,-80 7455,-80 ; 7435,-60 7455,-80
VCC4: C24.1 CA4.1 DS2.1 R10.2 R39.2 S1.2 U9.4 | length 6634.3
  Top Layer w10: DS2.1@7394,-2930 v1(7394,-2854)
  Top Layer w20: R39.2@7445,-2230 C24.1@7325,-2230 7326,-2231 CA4.1@7326,-2364 7405,-2364 7438.31,-2397.31 v1(7438.31,-2470.21) U9.4@7555.86,-2470.21 ; v1(8990,-915) v1(10335,-915) ; v1(9170,-1630) 9245,-1555 9245,-920
  Bottom Layer w10: v1(7394,-2854) 7394,-2514.53 v1(7438.31,-2470.21) ; R10.2@10125,-310 10180,-310 10190,-320 10190,-355 10205,-370 10280,-370 10335,-425 v1(10335,-915)
  Bottom Layer w20: U9.4@7555.86,-2470.21 7674.79,-2470.21 7705,-2440 7705,-1700 7775,-1630 v1(9170,-1630) ; S1.2@8965,-590 8965,-650 8990,-675 v1(8990,-915)
pads on no net: J1.1 J2.3 J2.7 P1.0 P1.1 P1.2 P2.17 P2.19 P4.5 P4.6 P5.1 P5.4 P9.6 P9.7 P9.8 U1.5 U2.5 U2.7 U2.9 U2.10 U2.11 U2.12 U2.14 U2.16 U2.19 U2.20 U2.32 U2.33 U2.34 U2.35 U2.36 U2.37 U2.38 U2.39 U2.43 U2.44 U2.45 U2.46 U2.47 U2.48 U2.49 U2.50 U3. U3.3 U3.4 U3.5 U3.6 U3.8 U3.9 U3.10 U3.11 U3.12 U3.13 U3.14 U3.16 U3.17 U3.20 U3.21 U3.22 U3.23 U3.24 U3.25 U3.26 U3.27 U3.28 U3.29 U4.1 U4.16 U4.17 U4.18 U4.19 U4.20 U4.21 U4.26 U4.27 U4.28 U4.29 U5.2 U5.3 U5.6 U5.8 U5.9 U5.10 U5.11 U5.12 U5.14 U5.19 U5.22 U5.24 U5.27 U5.28 U7.3 U7.4 U7.41 U7.44 U7.45 U7.54 U8.3 U8.5 U10. U10.7 U11.33 U11.37 U11.41 U11.42 U12.1 U13.3 U13.7 U13.10 U13.11
copper on no net:
  other v6: 7865,-2830 10207.52,-2830 7865,-1904.8 10207.52,-1904.8

## Polygon pours and split planes (outlines as drawn)
GND on Top Layer "Top Layer-No Net" (solid, remove dead copper, pour order 8): 11095,1035 11095,-3410 3925,-3410 3925,1035
GND on Bottom Layer "Top Layer-No Net" (solid, remove dead copper, pour order 10): 11095,1035 11095,-3410 3925,-3410 3925,1035

## Keep-outs
Keep-Out Layer:
  circle w10: c332.01,915 r62.99
  circle w10: c332.01,-5150 r62.99
  circle w10: c10977.01,915 r62.99
  circle w10: c3249.88,-290 r55.12
  circle w10: c734.88,-290 r55.12
  circle w10: c779.88,-2180 r55.12
  circle w10: c3204.88,-2180 r55.12
  circle w10: c1992.38,-4885 r55.12
  circle w10: c10972.01,-5150 r62.99
  circle w10: c5797.01,915 r62.99
  circle w10: c5797.01,-5150 r62.99
  lines w5: 210,-5270 210,1035 11095,1035 11095,-5270 3885,-5270 210,-5270

## Other copper
Top Layer:
  rectangle net NetMOS1_5: 6935,-2750 6985,-2580
  rectangle net VCC: 7490,-2695 7620,-2580
  pour cut-out: 9010,1025 9010,-90 9820,-90 9820,1025
  pour cut-out: 10047,-1675.2 11082.26,-1675.2 11082.26,-3155 10050,-3155
Bottom Layer:
  pour cut-out: 9010,1025 9010,-90 9820,-90 9820,1025
  pour cut-out: 10047,-1675.2 11082.26,-1675.2 11082.26,-3155 10050,-3155

## Silkscreen, mask and mechanical layers (free items; w line width, h text height)
Top Overlay:
  drawing of 1628 lines, arcs and shapes, not listed
  text "Fibre Monitoring System V1.0" at 9940.12,-4117.72 h30
  text "2013.10.24" at 9936.18,-4189.57 h30

## Text inside footprints (layer, text, board x,y; h text height)
J1: Top Overlay "9" at 7365,665 h35; Top Overlay "5" at 7335,535 h35; Top Overlay "6" at 7890,665 h35; Top Overlay "1" at 7915,535 h35
P8: Top Overlay "6" at 4356.1,-1409.84 h25; Top Overlay "10" at 4916.1,-1409.84 h25; Top Overlay "5" at 4919.21,-1720.28 h25; Top Overlay "1" at 4368.03,-1720.28 h25
P9: Top Overlay "2" at 6050,-1270 h25; Top Overlay "1" at 6055,-1385 h25; Top Overlay "9" at 6595,-1385 h25; Top Overlay "10" at 6595,-1285 h25
P10: Top Overlay "1" at 6050,-2735 h30 r180; Top Overlay "1" at 6090,-2855 h30 r180; Top Overlay "1" at 6050,-2855 h30 r180; Top Overlay "10" at 5010,-2755 h30 r180; Top Overlay "20" at 5010,-2855 h30 r180
U1: Top Overlay "GND" at 9825,-1310 h30; Top Overlay "CLK" at 9041.37,-1111 h30; Top Overlay "VCC" at 9056.37,-1326 h30; Top Overlay "RESET" at 9046.37,-1216 h30; Top Overlay "IO" at 9837.37,-1129.63 h30; Top Overlay "VPP" at 9820,-1225 h30
开光电: Top Overlay "N" at 10205,-2180 h30; Top Overlay "L" at 10210,-2570 h30; Top Overlay "5V+" at 7795,-2475 h30; Top Overlay "GND" at 7785,-2090 h30